# Altium PCB openrex_addon_V1.PcbDoc
Units mm, origin at the board's own origin, x right, y up, seen from the top; angles counter-clockwise.
Board outline 70 x 95 mm, 8 copper layers (Top Layer, Mid-Layer 1, Mid-Layer 2, Mid-Layer 3, Mid-Layer 4, Mid-Layer 5, Mid-Layer 6, Bottom Layer); 8 components, 0 nets, 66 pads, 0 vias.
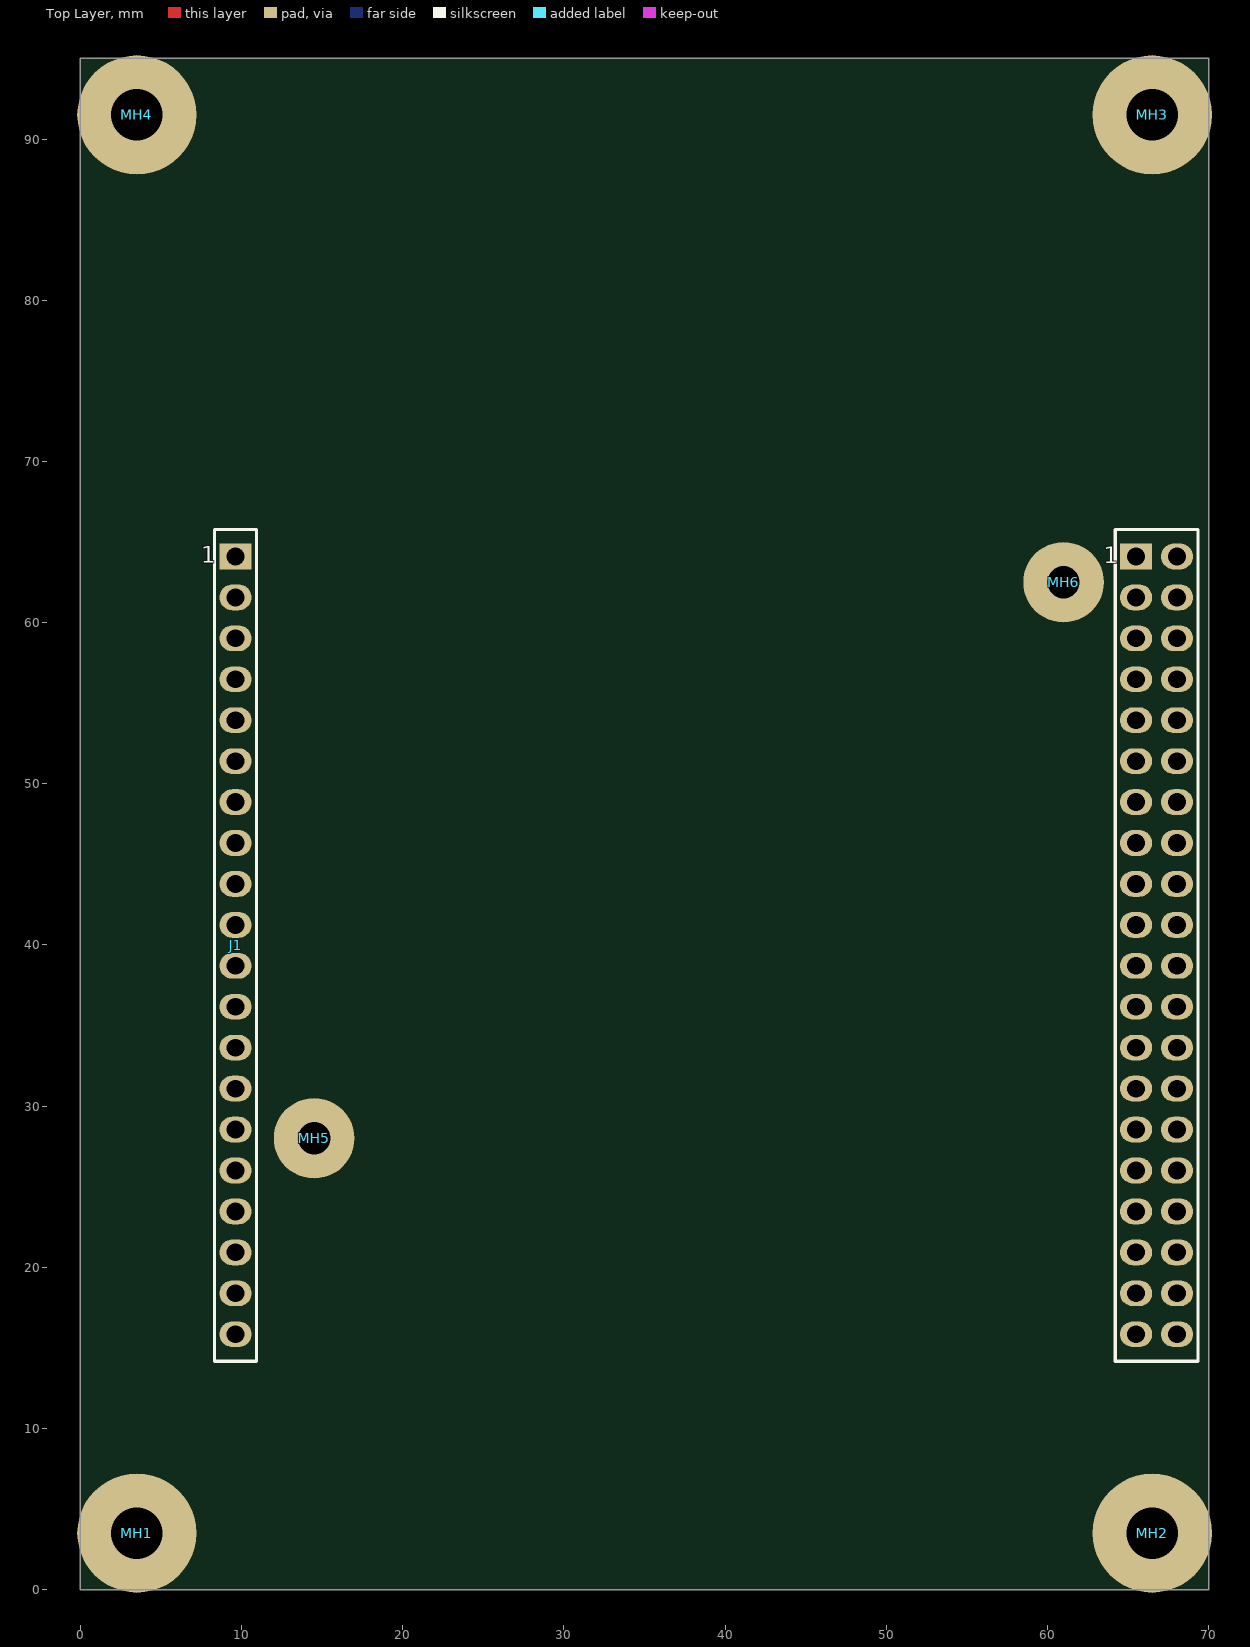
[diagram p0: Top Layer view]
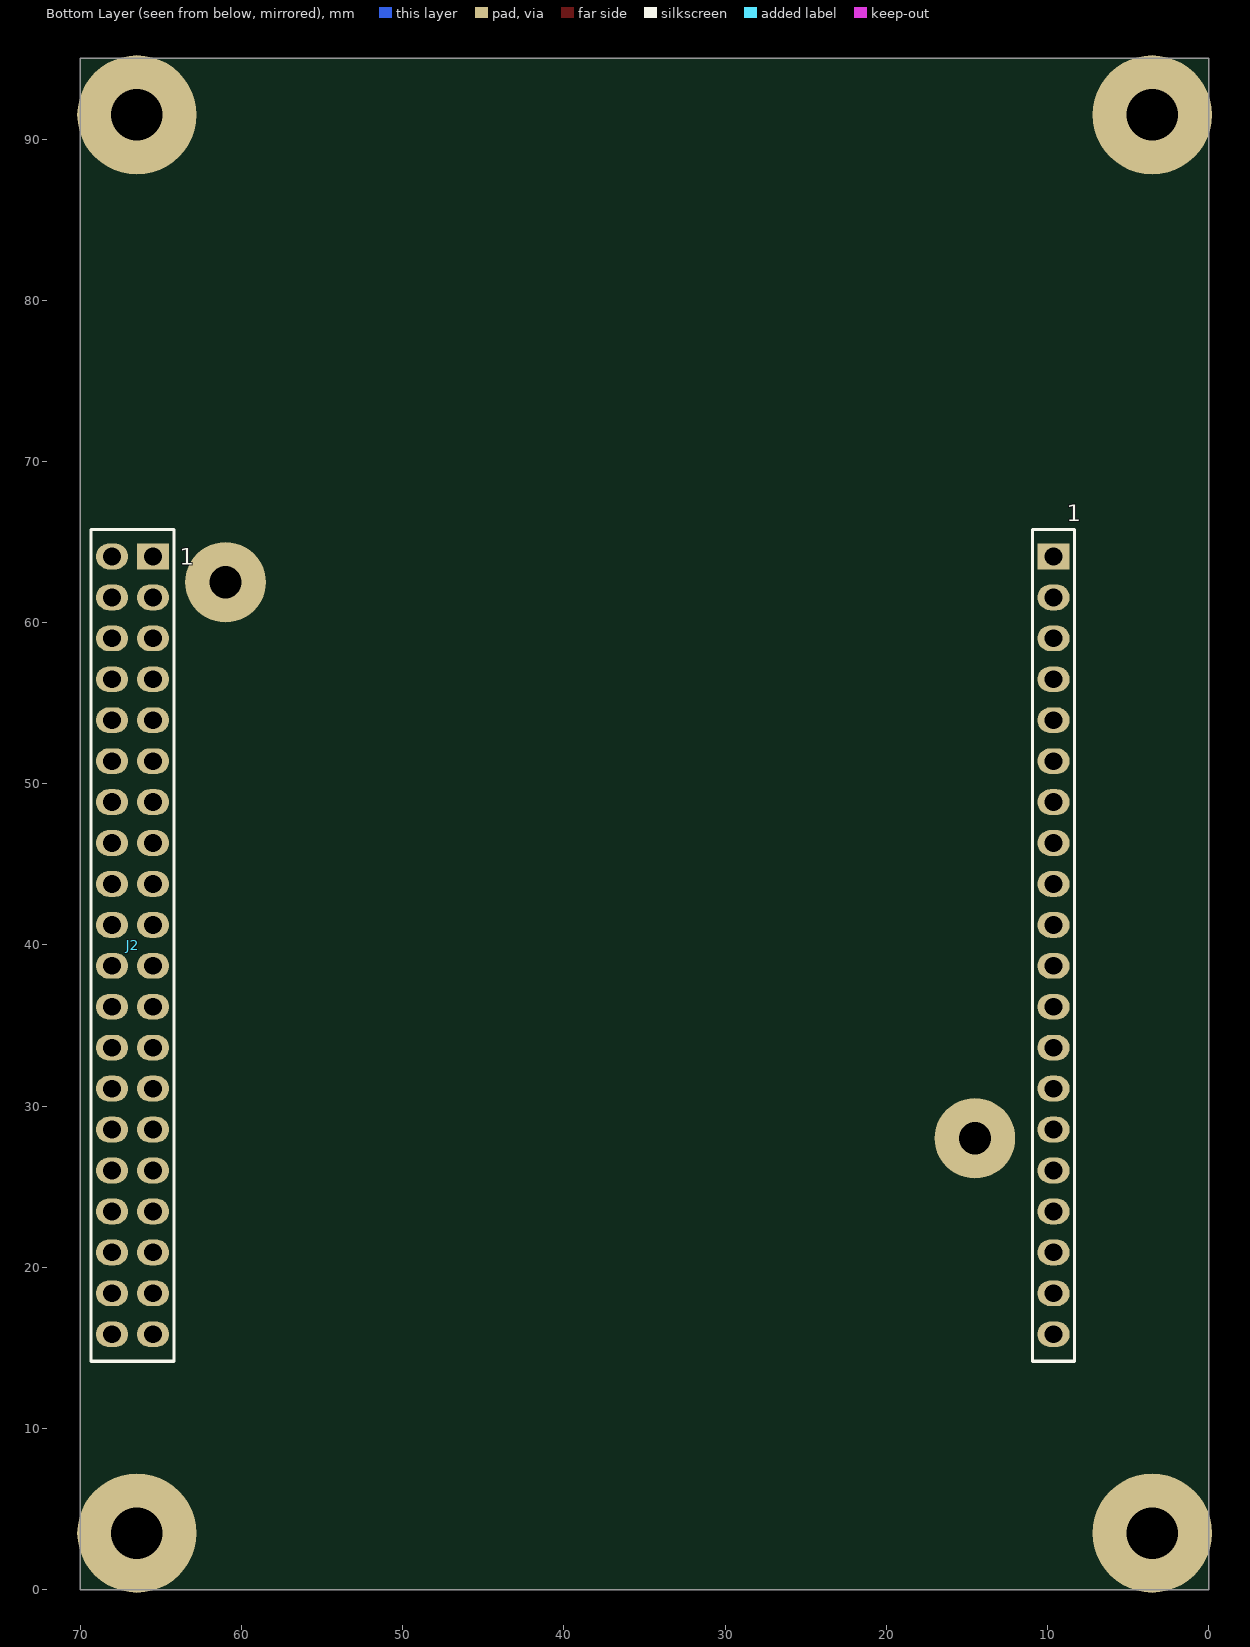
[diagram p1: Bottom Layer view, seen from below]

## Layer stack, top to bottom
Top Solder: solder mask 0.0102, Solder Resist, Dk 3.5
Top Layer: signal copper 0.0356
Dielectric 1: dielectric 0.32, FR-4, Dk 4.8
Mid-Layer 1: signal copper 0.0356
Dielectric2: dielectric 0.32, FR-4, Dk 4.8
Mid-Layer 2: signal copper 0.0356
Dielectric6: dielectric 0.32, FR-4, Dk 4.8
Mid-Layer 3: signal copper 0.0356
Dielectric4: dielectric 0.32, FR-4, Dk 4.8
Mid-Layer 4: signal copper 0.0356
Dielectric3: dielectric 0.32, FR-4, Dk 4.8
Mid-Layer 5: signal copper 0.0356
Dielectric5: dielectric 0.32, FR-4, Dk 4.8
Mid-Layer 6: signal copper 0.0356
Dielectric7: dielectric 0.32, FR-4, Dk 4.8
Bottom Layer: signal copper 0.0356
Bottom Solder: solder mask 0.0102, Solder Resist, Dk 3.5

## Board outline
0,0 70,0 70,95 0,95 0,0

## Design rules (kind name [scope] priority, off if disabled: settings)
Clearance [All] p1: gap=0.254
PolygonConnect [All] p1: connectstyle=Relief reliefconductorwidth=0.254 reliefentries=4 polygonreliefangle="90 Angle" airgapwidth=0.254
RoutingVias [All] p1: holewidth=0.711 width=1.27 viastyle="Through Hole" minholewidth=0.711 minwidth=1.27 maxholewidth=0.711 maxwidth=1.27
SolderMaskExpansion [All] p1: expansion=0.102
Width [All] p1: maxlimit=0.254 minlimit=0.254 preferedwidth=0.254
30 further rules are at their usual default settings.

## Components (designator, comment, footprint, x,y, rotation, side; value= is the part's Value field where it differs from the comment)
J1 "ESQ-120-14-G-S" ESQ-120-14-G-S 9.62,64.1 r0 top locked
J2 "ESQ-120-14-G-D" ESQ-120-14-G-D 65.5,64.1 r180 bottom locked
MH1 "MH_7.4MMC_3.2MMD" MH_7.4MMD_3.2MMD 3.5,3.5 r0 top locked
MH2 "MH_7.4MMC_3.2MMD" MH_7.4MMD_3.2MMD 66.5,3.5 r0 top locked
MH3 "MH_7.4MMC_3.2MMD" MH_7.4MMD_3.2MMD 66.5,91.5 r0 top locked
MH4 "MH_7.4MMC_3.2MMD" MH_7.4MMD_3.2MMD 3.5,91.5 r0 top locked
MH5 "MH_5MMC_2MMD" MH_5MMD_2MMD 14.5,28 r0 top locked
MH6 "MH_5MMC_2MMD" MH_5MMD_2MMD 61,62.5 r0 top locked

## Footprints (in the part's own frame and the unit in brackets; to place one, negate y for a bottom-side part, rotate by r counter-clockwise, add the part's x,y. Pads: shape width x height; smd on the part's side, far side on the other; paste and mask are expansions set on the pad)
ESQ-120-14-G-D [mm] "Creator MM"
  rect 2x1.6 hole 1.1: 1(0,0)
  oval 2x1.6 hole 1.1: 2(-2.54,0) 3(0,-2.54) 4(-2.54,-2.54) 5(0,-5.08) 6(-2.54,-5.08) 7(0,-7.62) 8(-2.54,-7.62) 9(0,-10.16) 10(-2.54,-10.16) 11(0,-12.7) 12(-2.54,-12.7) 13(0,-15.24) 14(-2.54,-15.24) 15(0,-17.78) 16(-2.54,-17.78) 17(0,-20.32) 18(-2.54,-20.32) 19(0,-22.86) 20(-2.54,-22.86) 21(0,-25.4) 22(-2.54,-25.4) 23(0,-27.94) 24(-2.54,-27.94) 25(0,-30.48) 26(-2.54,-30.48) 27(0,-33.02) 28(-2.54,-33.02) 29(0,-35.56) 30(-2.54,-35.56) 31(0,-38.1) 32(-2.54,-38.1) 33(0,-40.64) 34(-2.54,-40.64) 35(0,-43.18) 36(-2.54,-43.18) 37(0,-45.72) 38(-2.54,-45.72) 39(0,-48.26) 40(-2.54,-48.26)
  silkscreen extent -3.84,-49.93 1.3,1.67, body extent -3.81,-49.78 1.27,1.52, height 12.11
ESQ-120-14-G-S [mm] "Creator MM"
  rect 2x1.6 hole 1.1: 1(0,0)
  oval 2x1.6 hole 1.1: 2(0,-2.54) 3(0,-5.08) 4(0,-7.62) 5(0,-10.16) 6(0,-12.7) 7(0,-15.24) 8(0,-17.78) 9(0,-20.32) 10(0,-22.86) 11(0,-25.4) 12(0,-27.94) 13(0,-30.48) 14(0,-33.02) 15(0,-35.56) 16(0,-38.1) 17(0,-40.64) 18(0,-43.18) 19(0,-45.72) 20(0,-48.26)
  silkscreen extent -1.3,-49.93 1.3,1.67, body extent -1.27,-49.78 1.27,1.52, height 11.11
MH_5MMD_2MMD [mm]
  round 5 / inner round 3.683 / far side round 5 hole 2: 1(0,0)
MH_7.4MMD_3.2MMD [mm]
  round 7.4 / inner round 3.683 / far side round 7.4 hole 3.2 mask+0.025: 1(0,0)

## Part data
J1: "CONN RCPT 20POS .100\" DUAL GOLD"
J2: "CONN RCPT 40POS .100\" DUAL GOLD"
MH1 MH2 MH3 MH4: "Mounting Hole 7.4mm Diameter, 3.2mm Drill"
MH5 MH6: "Mounting Hole 5mm Diameter, 2mm Drill"

## Nets (pads, with @x,y where several pads share a name; then routed paths per layer and width w, separated by ;. In a path a pad name is that pad's centre, name@x,y a point inside that pad or via, vN(x,y) a via of type N, cw(c..) or ccw(c..) an arc to the next point about the centre after c; other vN are vias at no path point)
pads on no net: J1.1 J1.2 J1.3 J1.4 J1.5 J1.6 J1.7 J1.8 J1.9 J1.10 J1.11 J1.12 J1.13 J1.14 J1.15 J1.16 J1.17 J1.18 J1.19 J1.20 J2.1 J2.2 J2.3 J2.4 J2.5 J2.6 J2.7 J2.8 J2.9 J2.10 J2.11 J2.12 J2.13 J2.14 J2.15 J2.16 J2.17 J2.18 J2.19 J2.20 J2.21 J2.22 J2.23 J2.24 J2.25 J2.26 J2.27 J2.28 J2.29 J2.30 J2.31 J2.32 J2.33 J2.34 J2.35 J2.36 J2.37 J2.38 J2.39 J2.40 MH1.1 MH2.1 MH3.1 MH4.1 MH5.1 MH6.1

## Text inside footprints (layer, text, board x,y; h text height)
J1: Bottom Overlay "1" at 8.8,66.3 h1.02; Top Overlay "1" at 7.5,63.7 h1.02
J2: Bottom Overlay "1" at 63.85,63.6 h1.02; Top Overlay "1" at 63.5,63.69 h1.02